# EAGLE board Line Follower (EAGLE 7.6.0)
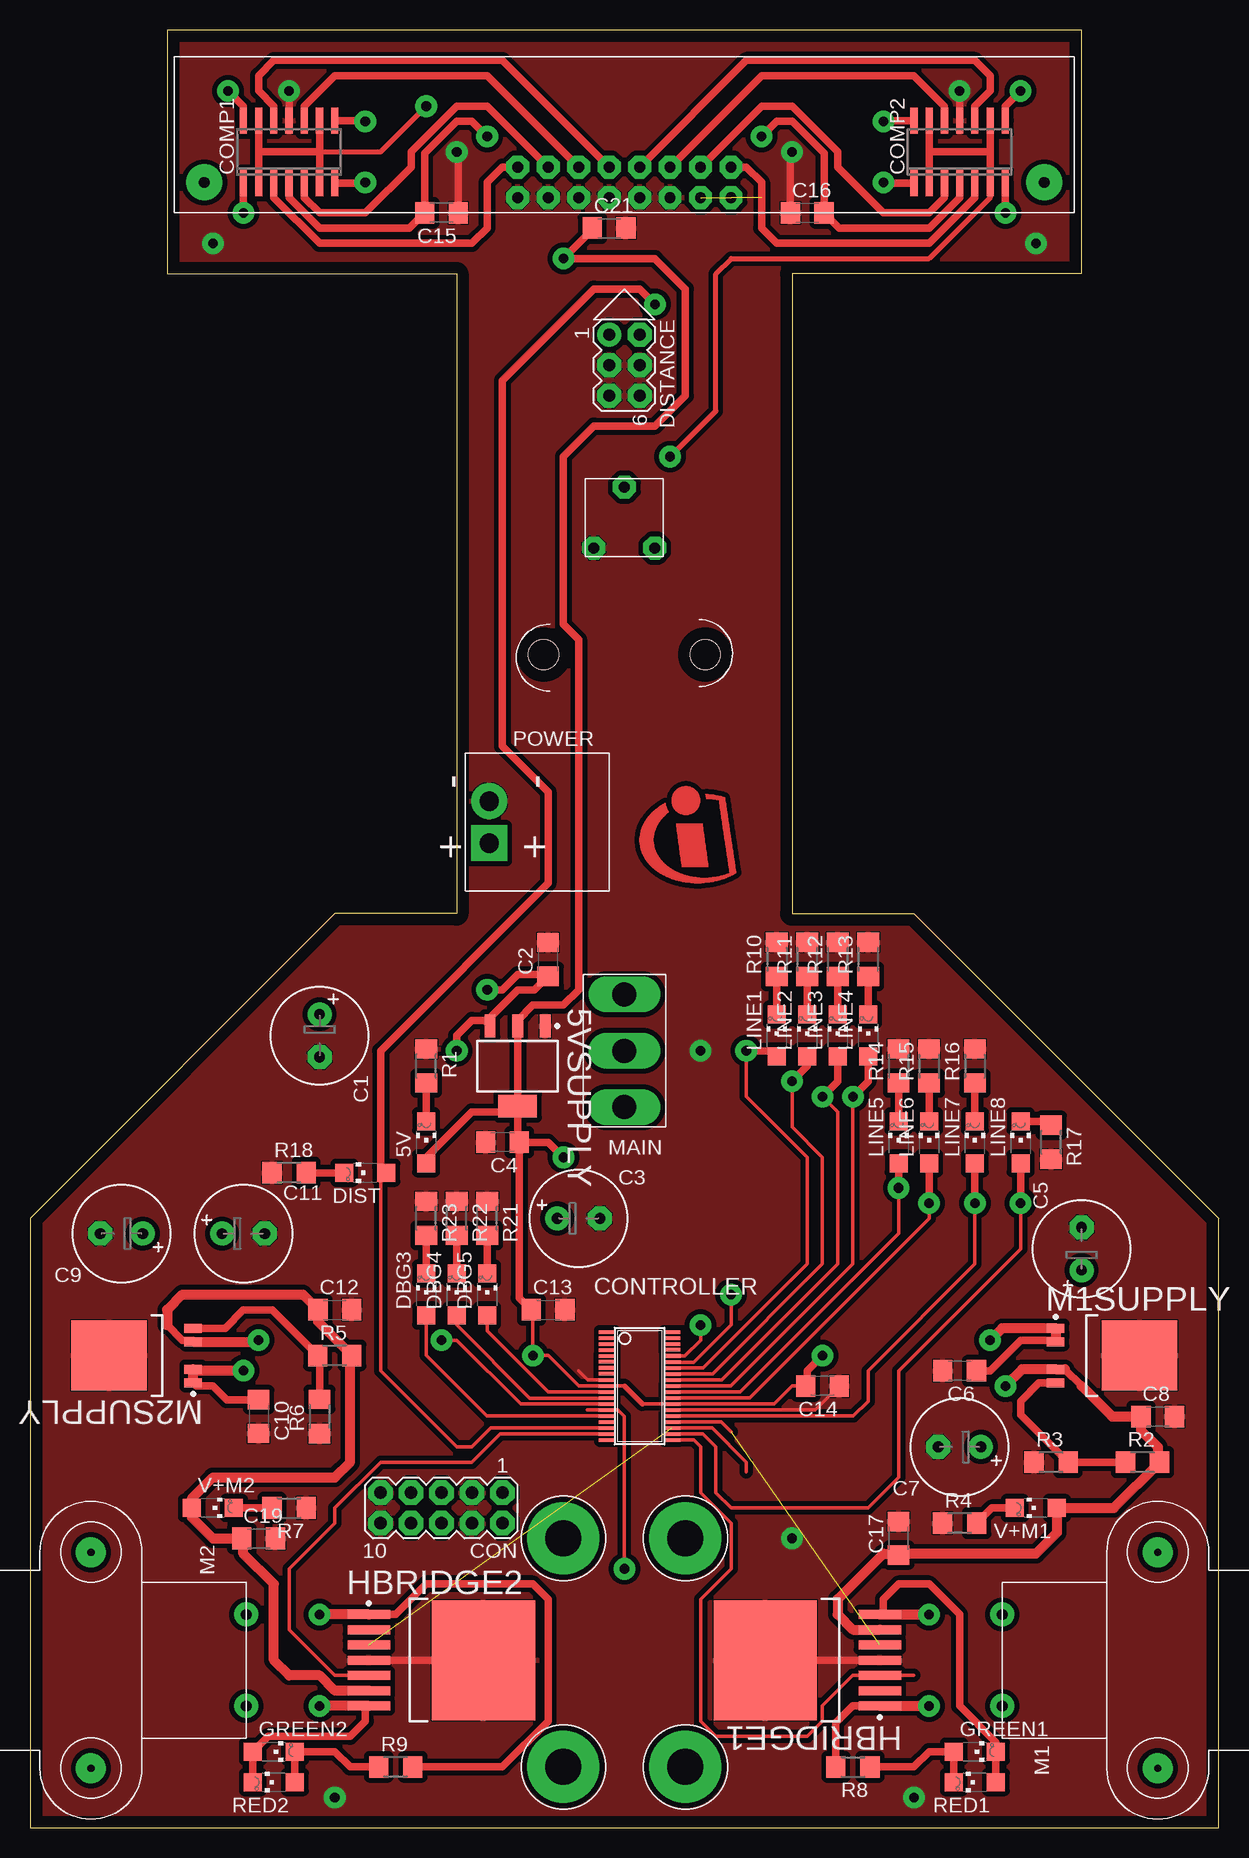
[diagram p0: board, top side]
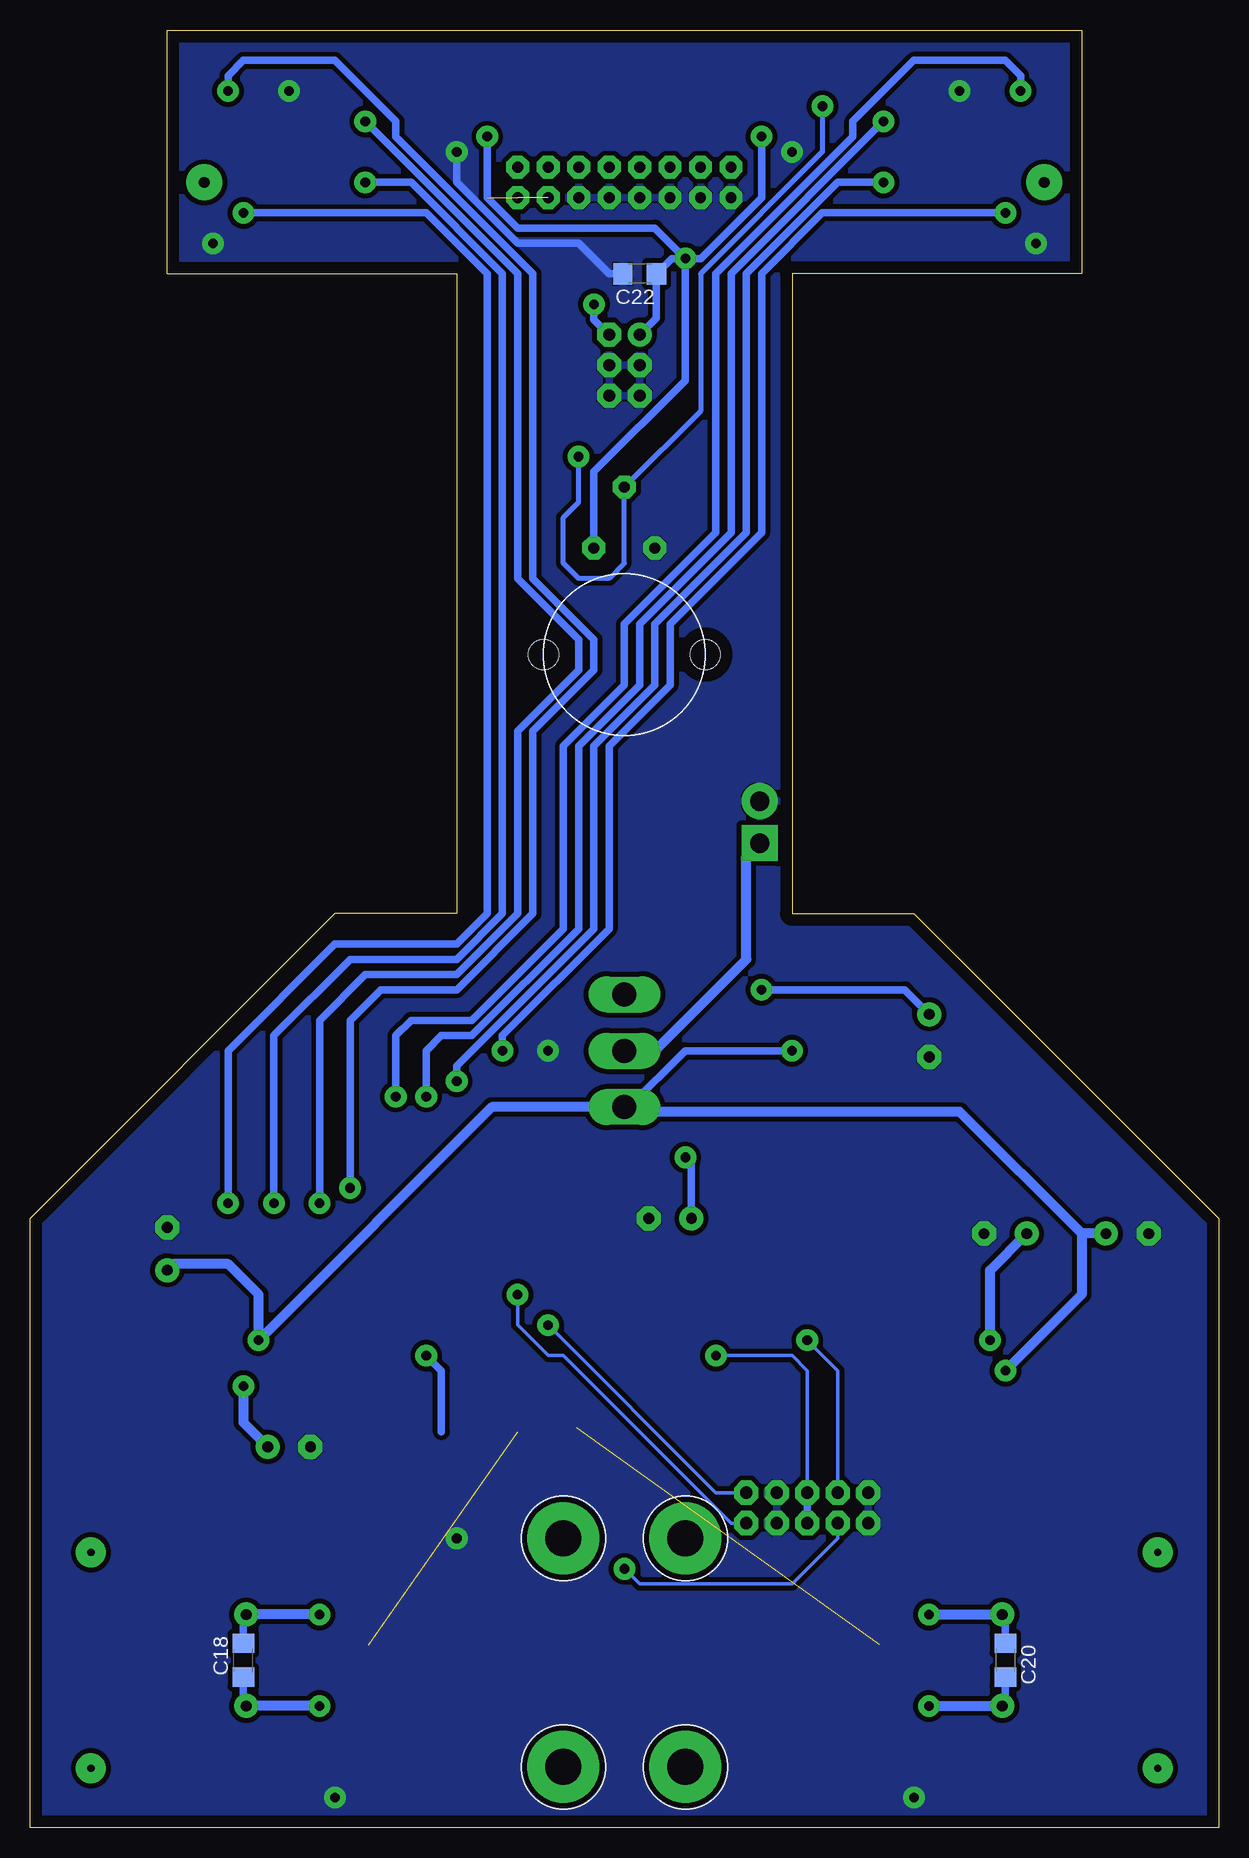
[diagram p1: board, bottom side, seen from below]

Size 99.06 x 149.86 mm. Coordinates in mm from the lower left corner, seen from the top.
Outline: 0,0 99.06,0 99.06,50.8 73.66,76.2 63.5,76.2 63.5,129.54 87.63,129.54 87.63,149.86 11.43,149.86 11.43,129.54 35.56,129.54 35.56,76.2 25.4,76.2 0,50.8 0,0
Copper layers (1*16): Top 0.035mm / dielectric 1.5mm / Bottom 0.035mm
Design rules "Line_Follower_Rules": minimum track width 0.3mm, minimum drill 0.3mm, track to track 0.17mm, track to pad 0.17mm, pad to pad 0.17mm, via to via 0.17mm, smd to smd 0.17mm, copper to edge 1mm, drill to drill 0.5mm, minimum pad ring 0.5mm, minimum via ring 0.5mm, stop-mask expansion 4mil, vias tented up to drill 0mil, thermal gap 0.1mm

## Footprints (pad centres in the part's own frame; a part is rotated, then mirrored left to right if it is on the bottom)
CHIPLED_1206 = smd 1.5 x 1.5: A 0,-1.75; C 0,1.75
INF-PG-SOT223_SC-73_M_1PRIMARY = smd 1.9 x 0.9: 1 -3.35,2.3; 2 -3.35,0; 3 -3.35,-2.3 | smd 1.9 x 3.2: 4 3.35,0
BALL = hole 2.5: -6.731,0; 6.731,0
E3,5-8 = drill 0.9 pad 2: + -1.778,0 | drill 0.9 pad 2 octagon: - 1.778,0
C1206 = smd 1.6 x 1.8: 1 -1.4,0; 2 1.4,0
SO14 = smd 0.6 x 2.2: 1 -3.81,-2.6; 2 -2.54,-2.6; 3 -1.27,-2.6; 4 0,-2.6; 5 1.27,-2.6; 6 2.54,-2.6; 7 3.81,-2.6; 8 3.81,2.6; 9 2.54,2.6; 10 1.27,2.6; 11 0,2.6; 12 -1.27,2.6; 13 -2.54,2.6; 14 -3.81,2.6
MA05-2 = drill 1.016 octagon: 1 -5.08,-1.27; 2 -5.08,1.27; 3 -2.54,-1.27; 4 -2.54,1.27; 5 0,-1.27; 6 0,1.27; 7 2.54,-1.27; 8 2.54,1.27; 9 5.08,-1.27; 10 5.08,1.27
XMC1000_P-TSSOP38-9 = smd 1.4 x 0.3: 1 -2.698,4.5; 2 -2.698,4.005; 3 -2.698,3.5; 4 -2.698,3.005; 5 -2.708,2.5; 6 -2.708,2.015; 7 -2.708,1.51; 8 -2.718,1.035; 9 -2.718,0.5; 10 -2.718,-0.005; 11 -2.718,-0.5; 12 -2.718,-1.025; 13 -2.708,-1.51; 14 -2.708,-2.005; 15 -2.708,-2.5; 16 -2.708,-2.995; 17 -2.708,-3.5; 18 -2.698,-3.995; 19 -2.698,-4.5; 20 2.698,-4.5; 21 2.698,-4; 22 2.698,-3.5; 23 2.698,-2.995; 24 2.698,-2.5; 25 2.698,-2.005; 26 2.708,-1.5; 27 2.708,-1; 28 2.708,-0.5; 29 2.708,-0.005; 30 2.718,0.5; 31 2.718,1; 32 2.718,1.5; 33 2.718,1.975; 34 2.718,2.51; 35 2.702,3.025; 36 2.702,3.5; 37 2.702,3.985; 38 2.702,4.5
MA03-2 = drill 1.016 pad 1.93: 1 -2.54,-1.27 | drill 1.016 pad 1.93 octagon: 2 -2.54,1.27; 3 0,-1.27; 4 0,1.27; 5 2.54,-1.27; 6 2.54,1.27
INF-PG-TO263-7-1_L_1PRIMARY = smd 3.55 x 0.75: 1 -6.05,3.81; 2 -6.05,2.54; 3 -6.05,1.27; 4 -6.05,0; 5 -6.05,-1.27; 6 -6.05,-2.54; 7 -6.05,-3.81 | smd 8.6 x 10: 8 3.5,0
QTR-8A = drill 0.9 pad 1.7 octagon: P$1 8.89,1.27; P$2 8.89,-1.27; P$3 6.35,1.27; P$4 6.35,-1.27; P$5 3.81,1.27; P$6 3.81,-1.27; P$7 1.27,1.27; P$8 1.27,-1.27; P$9 -1.27,1.27; P$10 -1.27,-1.27; P$11 -3.81,1.27; P$12 -3.81,-1.27; P$13 -6.35,1.27; P$14 -6.35,-1.27; P$15 -8.89,1.27; P$16 -8.89,-1.27 | drill 0.9 pad 3: P$17 -35,0; P$18 35,0
MICRO-MOTOR = drill 0.6 pad 2.5: 1 -9,0; 2 9,0 | drill 0.9 pad 2: M1 -3.81,12.95; M2 3.81,12.95
INF-PG-TO252-5-11_L_1PRIMARY = smd 1.45 x 0.75: 1 -4.7,2.28; 2 -4.7,1.14; 4 -4.7,-1.14; 5 -4.7,-2.28 | smd 6.3 x 5.85: 3 2.3,0
MS111 = drill 2 pad 3 long: P$1 0,4.7; P$2 0,0; P$3 0,-4.7
PWRCON = drill 1.6 pad 3 square: + -1.75,10 | drill 1.6 pad 3: - 1.75,10
R1206 = smd 1.6 x 1.803: 1 -1.422,0; 2 1.422,0
TRIMMER = drill 0.9 pad 1.8 octagon: 1 -2.54,-1.27; 2 2.54,-1.27; 3 0,3.81
SPACERS_M3 = drill 3 pad 6: P$1 0,0

## Placement (x,y rotation side)
5V  LED  [CHIPLED_1206]  33.02,57.15 0 top
5VSUPPLY  IFX8117ME_V50  [INF-PG-SOT223_SC-73_M_1PRIMARY]  40.64,63.5 270 top
BALL  BALL  [BALL]  49.53,97.79 0 bottom
C1  C-POL470UF  [E3,5-8]  24.13,66.04 270 top
C2  C100NF  [C1206]  43.18,72.39 90 top
C3  C-POL470UF  [E3,5-8]  45.72,50.8 0 top
C4  C100NF  [C1206]  39.37,57.15 180 top
C5  C-POL470UF  [E3,5-8]  87.63,48.26 90 top
C6  C100NF  [C1206]  77.47,38.1 180 top
C7  C-POL470UF  [E3,5-8]  77.47,31.75 180 top
C8  C100NF  [C1206]  93.98,34.29 0 top
C9  C-POL470UF  [E3,5-8]  7.62,49.53 180 top
C10  C100NF  [C1206]  19.05,34.29 270 top
C11  C-POL470UF  [E3,5-8]  17.78,49.53 0 top
C12  C100NF  [C1206]  25.4,43.18 0 top
C13  C100NF  [C1206]  43.18,43.18 0 top
C14  C100NF  [C1206]  66.04,36.83 180 top
C15  C100NF  [C1206]  34.29,134.62 180 top
C16  C100NF  [C1206]  64.77,134.62 0 top
C17  C100NF  [C1206]  72.39,24.13 90 top
C18  C100NF  [C1206]  81.28,13.97 90 bottom
C19  C100NF  [C1206]  19.05,24.13 0 top
C20  C100NF  [C1206]  17.78,13.97 270 bottom
C21  C100NF  [C1206]  48.26,133.35 0 top
C22  C100NF  [C1206]  48.26,129.54 180 bottom
COMP1  LM324  [SO14]  21.59,139.7 0 top
COMP2  LM324  [SO14]  77.47,139.7 0 top
CON  PROGRAMMING  [MA05-2]  34.29,26.67 180 top
CONTROLLER  XMC1000_XMC1000-T038  [XMC1000_P-TSSOP38-9]  50.8,36.83 0 top
DBG3  LED  [CHIPLED_1206]  33.02,44.45 0 top
DBG4  LED  [CHIPLED_1206]  35.56,44.45 0 top
DBG5  LED  [CHIPLED_1206]  38.1,44.45 0 top
DIST  LED  [CHIPLED_1206]  27.94,54.61 90 top
DISTANCE  DISTANCE_SENSOR  [MA03-2]  49.53,121.92 270 top
GREEN1  LED  [CHIPLED_1206]  78.74,6.35 270 top
GREEN2  LED  [CHIPLED_1206]  20.32,6.35 270 top
HBRIDGE1  TLE5206  [INF-PG-TO263-7-1_L_1PRIMARY]  64.77,13.97 180 top
HBRIDGE2  TLE5206  [INF-PG-TO263-7-1_L_1PRIMARY]  34.29,13.97 0 top
LINE  QTR-8ASENSOR_BAR  [QTR-8A]  49.53,137.16 0 top
LINE1  LED  [CHIPLED_1206]  62.23,66.04 0 top
LINE2  LED  [CHIPLED_1206]  64.77,66.04 0 top
LINE3  LED  [CHIPLED_1206]  67.31,66.04 0 top
LINE4  LED  [CHIPLED_1206]  69.85,66.04 0 top
LINE5  LED  [CHIPLED_1206]  72.39,57.15 0 top
LINE6  LED  [CHIPLED_1206]  74.93,57.15 0 top
LINE7  LED  [CHIPLED_1206]  78.74,57.15 0 top
LINE8  LED  [CHIPLED_1206]  82.55,57.15 0 top
M1  MOTORPCBMOTOR  [MICRO-MOTOR]  93.98,13.97 90 top
M1SUPPLY  TLF1963  [INF-PG-TO252-5-11_L_1PRIMARY]  90.17,39.37 0 top
M2  MOTORPCBMOTOR  [MICRO-MOTOR]  5.08,13.97 270 top
M2SUPPLY  TLF1963  [INF-PG-TO252-5-11_L_1PRIMARY]  8.89,39.37 180 top
MAIN  SWITCH1OFF2  [MS111]  49.53,64.77 180 top
POWER  PWRCONCON1  [PWRCON]  48.26,83.82 90 top
R1  470  [R1206]  33.02,63.5 270 top
R2  47K  [R1206]  92.71,30.48 0 top
R3  12K  [R1206]  85.09,30.48 0 top
R4  470  [R1206]  77.47,25.4 0 top
R5  47K  [R1206]  25.4,39.37 0 top
R6  12K  [R1206]  24.13,34.29 90 top
R7  470  [R1206]  21.59,26.67 180 top
R8  470  [R1206]  68.58,5.08 180 top
R9  470  [R1206]  30.48,5.08 0 top
R10  470  [R1206]  62.23,72.39 90 top
R11  470  [R1206]  64.77,72.39 90 top
R12  470  [R1206]  67.31,72.39 90 top
R13  470  [R1206]  69.85,72.39 90 top
R14  470  [R1206]  72.39,63.5 90 top
R15  470  [R1206]  74.93,63.5 90 top
R16  470  [R1206]  78.74,63.5 90 top
R17  470  [R1206]  85.09,57.15 270 top
R18  470  [R1206]  21.59,54.61 0 top
R21  470  [R1206]  38.1,50.8 270 top
R22  470  [R1206]  35.56,50.8 270 top
R23  470  [R1206]  33.02,50.8 270 top
RED1  LED  [CHIPLED_1206]  78.74,3.81 90 top
RED2  LED  [CHIPLED_1206]  20.32,3.81 90 top
SENSITIVITY  R-TRIMMER  [TRIMMER]  49.53,107.95 0 top
U$1  [INFINEON_LOGO_INFINEON_ICON_8]  50.8,78.74 0 top
U$2  SPACER  [SPACERS_M3]  44.45,5.08 0 top
U$3  SPACER  [SPACERS_M3]  54.61,5.08 0 top
U$4  SPACER  [SPACERS_M3]  44.45,24.13 0 top
U$5  SPACER  [SPACERS_M3]  54.61,24.13 0 top
V+M1  LED  [CHIPLED_1206]  83.82,26.67 90 top
V+M2  LED  [CHIPLED_1206]  15.24,26.67 270 top

## Library data of the parts
5V 5VSUPPLY BALL C1-C22 COMP1 COMP2 CON CONTROLLER DBG3-DBG5 DIST DISTANCE GREEN1 GREEN2 HBRIDGE1 HBRIDGE2 LINE LINE1-LINE8 M1 M1SUPPLY M2 M2SUPPLY MAIN POWER R1-R18 R21-R23 RED1 RED2 SENSITIVITY U$1-U$5 V+M1 V+M2 = Line_Follower_LIBV2.1

## Nets
+5V: 5V.A 5VSUPPLY.2 5VSUPPLY.4 C3.+ C4.1 C13.1 C14.2 C15.2 C16.2 C21.1 C22.1 COMP1.4 COMP2.4 CON.5 CON.6 CONTROLLER.10 CONTROLLER.26 DISTANCE.1 LINE.P$2 LINE.P$4 SENSITIVITY.2
GND: 5VSUPPLY.1 C1.- C2.2 C3.- C4.2 C5.- C6.2 C7.- C8.2 C9.- C10.2 C11.- C12.2 C13.2 C14.1 C15.1 C16.1 C17.2 C19.2 C21.2 C22.2 COMP1.11 COMP2.11 CON.3 CON.4 CON.9 CON.10 CONTROLLER.9 CONTROLLER.25 DISTANCE.3 DISTANCE.4 DISTANCE.5 DISTANCE.6 HBRIDGE1.4 HBRIDGE1.8 HBRIDGE2.4 HBRIDGE2.8 LINE.P$6 LINE.P$8 LINE.P$10 LINE.P$12 LINE.P$14 LINE.P$16 M1SUPPLY.3 M2SUPPLY.3 POWER.- R1.1 R3.1 R4.1 R6.1 R7.1 R10.2 R11.2 R12.2 R13.2 R14.2 R15.2 R16.2 R17.2 R18.1 R21.1 R22.1 R23.1 SENSITIVITY.1
IN1M1: CONTROLLER.20 HBRIDGE1.3
IN1M2: CONTROLLER.22 HBRIDGE2.3
IN2M1: CONTROLLER.23 HBRIDGE1.5
IN2M2: CONTROLLER.18 HBRIDGE2.5
N$1: MAIN.P$2 POWER.+
N$2: C20.2 GREEN2.A HBRIDGE2.7 M2.M2 RED2.C
N$3: 5V.C R1.2
N$4: CON.1 CONTROLLER.34
N$5: CON.2 CONTROLLER.33
N$6: CON.7 CONTROLLER.13
N$7: CON.8 CONTROLLER.14
N$8: COMP1.2 COMP1.6 COMP1.9 COMP1.13 COMP2.2 COMP2.6 COMP2.9 COMP2.13 SENSITIVITY.3
N$9: COMP1.3 LINE.P$15
N$10: COMP1.5 LINE.P$13
N$11: COMP1.10 LINE.P$11
N$12: COMP1.12 LINE.P$9
N$13: COMP2.5 LINE.P$1
N$14: COMP2.3 LINE.P$3
N$15: COMP2.12 LINE.P$5
N$16: COMP2.10 LINE.P$7
N$17: 5VSUPPLY.3 C1.+ C2.1 C5.+ C6.1 C9.+ C10.1 M1SUPPLY.1 M1SUPPLY.2 M2SUPPLY.1 M2SUPPLY.2 MAIN.P$1
N$18: M1SUPPLY.5 R2.1 R3.2
N$19: R4.2 V+M1.C
N$20: M2SUPPLY.5 R5.1 R6.2
N$21: R7.2 V+M2.C
N$22: GREEN1.A R8.1 RED1.C
N$23: C18.2 GREEN1.C HBRIDGE1.7 M1.M2 RED1.A
N$24: C18.1 HBRIDGE1.1 M1.M1 R8.2
N$25: C20.1 HBRIDGE2.1 M2.M1 R9.2
N$26: CONTROLLER.12 DBG4.A
N$27: COMP1.14 CONTROLLER.29 LINE4.A
N$28: COMP1.8 CONTROLLER.30 LINE3.A
N$29: COMP1.7 CONTROLLER.31 LINE2.A
N$30: COMP1.1 CONTROLLER.32 LINE1.A
N$31: COMP2.1 CONTROLLER.24 LINE7.A
N$32: COMP2.7 CONTROLLER.21 LINE8.A
N$33: COMP2.8 CONTROLLER.28 LINE5.A
N$34: COMP2.14 CONTROLLER.27 LINE6.A
N$35: CONTROLLER.17 DIST.A DISTANCE.2
N$37: LINE1.C R10.1
N$39: LINE2.C R11.1
N$40: LINE3.C R12.1
N$41: LINE4.C R13.1
N$42: LINE5.C R14.1
N$43: LINE6.C R15.1
N$44: LINE7.C R16.1
N$45: LINE8.C R17.1
N$46: DIST.C R18.2
N$51: CONTROLLER.15 DBG3.A
N$52: CONTROLLER.11 DBG5.A
N$54: DBG5.C R21.2
N$55: DBG4.C R22.2
N$56: DBG3.C R23.2
N$58: GREEN2.C R9.1 RED2.A
V+M1: C7.+ C8.1 C17.1 HBRIDGE1.6 M1SUPPLY.4 R2.2 V+M1.A
V+M2: C11.+ C12.1 C19.1 HBRIDGE2.6 M2SUPPLY.4 R5.2 V+M2.A

## Tracks (layer width: path | path; a pad name or v marks a point on that pad's centre or on a via)
+5V  (via drill 0.8 pad 1.78)  (2 unrouted)
  Top 0.305: C14.2 63.5,36.83 62,35.33 CONTROLLER.26 51.03,35.33 | 49.53,36.83 CONTROLLER.10 45.72,36.83 43.18,39.37 v41.91,39.37 41.91,43.05 C13.1
  Top 0.406: 51.03,35.33 49.53,36.83
  Top 0.61: 5VSUPPLY.4 5VSUPPLY.2 40.64,67.31 41.91,68.58 44.45,68.58 45.72,69.85 45.72,99.06 44.45,100.33 44.45,114.3 46.99,116.84 52.07,116.84 54.61,119.38 54.61,128.27 52.07,130.81 v44.45,130.81 46.99,133.35 46.99,133.22 C21.1 | 5VSUPPLY.4 40.64,57.28 C4.1 | v66.04,39.37 64.77,38.1 64.77,36.96 C14.2 | v44.45,55.88 43.18,57.15 C4.1 | 5V.A 33.02,55.88 36.83,59.69 40.18,59.69 5VSUPPLY.4 | COMP1.4 21.59,135.89 24.13,133.35 31.62,133.35 C15.2 | C15.2 32.89,137.03 | C15.2 32.89,139.57 35.56,142.24 36.83,142.24 v38.1,140.97 | COMP2.4 77.47,135.89 74.93,133.35 67.44,133.35 C16.2 66.17,139.57 63.5,142.24 62.23,142.24 v60.96,140.97 | C4.1 40.77,44.19 C13.1
  Bottom 0.305: v41.91,39.37 35.56,39.37 34.29,38.1 CON.5
  Bottom 0.61: 64.77,33.02 64.77,38.1 v66.04,39.37 | C3.+ 43.94,55.37 v44.45,55.88 | v38.1,140.97 38.1,135.89 43.18,130.81 v44.45,130.81 | v44.45,130.81 44.45,128.27 | 48.13,124.59 DISTANCE.1 46.86,125.86 C22.1 45.59,130.81 v44.45,130.81 | SENSITIVITY.2 52.07,113.03 44.45,120.65 v44.45,130.81 | v60.96,140.97 60.96,135.89 58.42,133.35 46.99,133.35 v44.45,130.81 | CON.5 CON.6
GND  (via drill 0.8 pad 1.78)
  Top 0.305: CONTROLLER.9 46.49,37.33 45.72,38.1 | CONTROLLER.25 65.44,34.83 C14.1
  Top 0.61: HBRIDGE2.8 HBRIDGE2.4 | HBRIDGE1.8 HBRIDGE1.4 | COMP1.11 v21.59,144.78 | C15.1 35.69,139.57 v35.56,139.7 | COMP2.11 v77.47,144.78 | C16.1 63.37,139.57 v63.5,139.7
  Bottom 0.61: C22.2 50.8,129.54 53.34,132.08 58.42,132.08 63.5,137.16 v63.5,139.7
  other vias: 15.24,132.08 83.82,132.08 55.88,64.77 63.5,24.13 25.4,2.54 73.66,2.54
  pour Bottom (isolate 0.406): 11.43,149.86 87.63,149.86 87.63,129.54 63.5,129.54 63.5,76.2 73.66,76.2 99.06,50.8 99.06,0 0,0 0,50.8 25.4,76.2 35.56,76.2 35.56,129.54 11.43,129.54
  pour Top (isolate 0.406): 11.43,149.86 87.63,149.86 87.63,129.54 63.5,129.54 63.5,76.2 73.66,76.2 99.06,50.8 99.06,0 0,0 0,50.8 25.4,76.2 35.56,76.2 35.56,129.54 11.43,129.54
IN1M1
  Top 0.305: CONTROLLER.20 55.3,32.33 55.88,31.75 55.88,27.94 58.42,25.4 58.42,21.59 55.88,19.05 55.88,8.89 57.15,7.62 64.77,7.62 66.04,8.89 66.04,10.16 68.58,12.7 HBRIDGE1.3 73.66,12.7
IN1M2  (1 unrouted)
  Top 0.305: CONTROLLER.22 56.84,33.33 59.69,30.48 59.69,29.69
IN2M1  (1 unrouted)
  Top 0.305: CONTROLLER.23 57.6,33.84 58.42,33.02
IN2M2
  Top 0.305: CONTROLLER.18 39.19,32.84 36.83,30.48 29.21,30.48 25.4,26.67 25.4,25.4 21.59,21.59 21.59,16.51 25.4,12.7 HBRIDGE2.5
N$1
  Bottom 0.813: MAIN.P$2 46.99,64.77 39.37,72.39 39.37,80.96 POWER.+
N$2  (via drill 0.8 pad 1.78)
  Top 0.61: RED2.C GREEN2.A 19.84,7.62 26.67,7.62 27.94,8.89 27.94,9.86 HBRIDGE2.7
  Top 0.813: HBRIDGE2.7 v24.13,10.16
  Bottom 0.61: C20.2 17.78,10.41 M2.M2
  Bottom 0.813: v24.13,10.16 M2.M2
N$3
  Top 0.61: 5V.C R1.2
N$4  (via drill 0.8 pad 1.78)
  Top 0.305: CONTROLLER.34 54.58,39.34 55.88,40.64 v55.88,41.91
  Bottom 0.305: CON.1 41.91,27.94 v55.88,41.91
N$5  (via drill 0.8 pad 1.78)
  Top 0.305: CONTROLLER.33 55.31,38.8 58.42,41.91 v58.42,44.45
  Bottom 0.305: v58.42,44.45 58.42,41.91 55.88,39.37 54.61,39.37 40.64,25.4 CON.2
N$6  (via drill 0.8 pad 1.78)
  Top 0.305: CONTROLLER.13 40.88,35.32 35.56,40.64 v34.29,40.64
  Bottom 0.305: CON.7 31.75,38.1 v34.29,40.64
N$7  (via drill 0.8 pad 1.78)
  Top 0.305: 46.45,34.83 CONTROLLER.14 48.99,34.83 49.53,34.29 v49.53,21.59
  Bottom 0.305: CON.8 31.75,24.13 35.56,20.32 48.26,20.32 v49.53,21.59
N$8  (via drill 0.8 pad 1.78)
  Top 0.406: 24.13,139.7 29.21,139.7 v33.02,143.51 | 80.01,139.7 80.01,135.89 74.93,130.81 58.42,130.81 57.15,129.54 57.15,118.11 v53.34,114.3
  Top 0.61: COMP1.2 19.05,139.7 | 19.05,139.7 COMP1.13 | 24.13,139.7 COMP1.6 | 24.13,139.7 19.05,139.7 | COMP1.9 24.13,139.7 | COMP2.9 80.01,139.7 | 80.01,139.7 COMP2.6 | COMP2.13 74.93,139.7 | COMP2.2 74.93,139.7 | 74.93,139.7 80.01,139.7
  Bottom 0.406: v33.02,143.51 33.02,139.7 43.18,129.54 43.18,118.11 SENSITIVITY.3 49.53,105.41 50.8,104.14 53.34,104.14 54.61,105.41 54.61,109.22 53.34,110.49 v53.34,114.3
N$9
  Top 0.61: COMP1.3 20.32,135.89 24.13,132.08 36.83,132.08 38.1,133.35 38.1,137.16 39.37,138.43 LINE.P$15
N$10
  Top 0.61: COMP1.5 22.86,135.89 24.13,134.62 27.94,134.62 31.75,138.43 31.75,139.7 35.56,143.51 38.1,143.51 LINE.P$13
N$11
  Top 0.61: COMP1.10 22.86,143.51 25.4,146.05 38.1,146.05 LINE.P$11
N$12
  Top 0.61: COMP1.12 20.32,143.51 19.05,144.78 19.05,146.05 20.32,147.32 39.37,147.32 LINE.P$9
N$13
  Top 0.61: COMP2.5 78.74,135.89 74.93,132.08 62.23,132.08 60.96,133.35 60.96,137.16 59.69,138.43 LINE.P$1
N$14
  Top 0.61: COMP2.3 76.2,135.89 74.93,134.62 71.12,134.62 67.31,138.43 67.31,139.7 63.5,143.51 60.96,143.51 LINE.P$3
N$15
  Top 0.61: COMP2.12 76.2,143.51 73.66,146.05 60.96,146.05 LINE.P$5
N$16
  Top 0.61: COMP2.10 78.74,143.51 80.01,144.78 80.01,146.05 78.74,147.32 59.69,147.32 LINE.P$7
N$17  (via drill 0.8 pad 1.78)
  Top 0.61: M1SUPPLY.2 85.34,40.64 82.55,40.64 80.01,38.1 C6.1 | C10.1 16.38,35.69 15.24,36.83 13.85,36.83 M2SUPPLY.1 | 38.1,67.09 37.88,67.31 36.83,67.31 35.56,66.04 v35.56,64.77 | 38.1,67.09 5VSUPPLY.3 | 38.1,67.09 38.1,67.31 40.64,69.85 42.04,69.85 C2.1 43.05,71.12 40.64,71.12 39.37,69.85 v38.1,69.85
  Top 0.813: M1SUPPLY.2 M1SUPPLY.1 81.02,41.65 v80.01,40.64 | M2SUPPLY.1 M2SUPPLY.2 13.72,38.1 v17.78,38.1
  Bottom 0.61: 49.15,59.69 49.15,60.07 44.45,64.77 v35.56,64.77 | v38.1,69.85 26.16,69.85 C1.+
  Bottom 0.813: C9.+ 11.43,49.53 | 11.43,49.53 21.59,59.69 49.15,59.69 MAIN.P$1 60.58,60.07 v80.01,40.64 80.01,44.45 82.55,46.99 87.12,46.99 C5.+ | 11.43,49.53 11.43,44.45 v17.78,38.1
N$18
  Top 0.61: R2.1 R3.2 82.55,34.44 82.55,35.56 84.08,37.09 M1SUPPLY.5
N$19
  Top 0.61: V+M1.C 80.16,26.67 R4.2
N$20
  Top 0.61: R6.2 24.13,39.37 R5.1 20.17,43.18 17.78,43.18 16.25,41.65 M2SUPPLY.5
N$21
  Top 0.61: V+M2.C R7.2
N$22
  Top 0.61: RED1.C GREEN1.A 74.93,6.35 73.66,5.08 R8.1
N$23  (via drill 0.8 pad 1.78)
  Top 0.61: RED1.A GREEN1.C 80.49,7.14 77.47,10.16 77.47,17.78 74.93,20.32 72.39,20.32 71.12,19.05 71.12,18.08 HBRIDGE1.7
  Top 0.813: HBRIDGE1.7 v74.93,17.78
  Bottom 0.61: C18.2 81.28,17.53 M1.M2
  Bottom 0.813: v74.93,17.78 M1.M2
N$24  (via drill 0.8 pad 1.78)
  Top 0.61: R8.2 67.16,8.74 68.58,10.16 HBRIDGE1.1
  Top 0.813: HBRIDGE1.1 v74.93,10.16
  Bottom 0.61: C18.1 81.28,10.41 M1.M1
  Bottom 0.813: v74.93,10.16 M1.M1
N$25  (via drill 0.8 pad 1.78)
  Top 0.61: HBRIDGE2.1 30.48,17.78 33.02,20.32 41.91,20.32 43.18,19.05 43.18,8.89 39.37,5.08 R9.2
  Top 0.813: HBRIDGE2.1 v24.13,17.78
  Bottom 0.61: C20.1 17.78,17.53 M2.M1
  Bottom 0.813: v24.13,17.78 M2.M1
N$26
  Top 0.305: DBG4.A 35.56,41.91 41.66,35.8 CONTROLLER.12
N$27  (via drill 0.8 pad 1.78)
  Top 0.305: CONTROLLER.29 58.41,36.83 68.58,46.99 v68.58,60.96
  Top 0.61: COMP1.14 17.78,143.51 v16.51,144.78 | LINE4.A 69.85,62.23 v68.58,60.96
  Bottom 0.61: v16.51,144.78 16.51,146.05 17.78,147.32 25.4,147.32 30.48,142.24 30.48,140.97 41.91,129.54 41.91,107.95 49.53,100.33 49.53,95.25 54.61,90.17 54.61,74.93 62.23,67.31 67.31,67.31 68.58,66.04 v68.58,60.96
N$28  (via drill 0.8 pad 1.78)
  Top 0.305: v66.04,60.96 67.31,59.69 67.31,46.99 57.65,37.33 CONTROLLER.30
  Top 0.61: COMP1.8 27.88,142.3 v27.94,142.24 | LINE3.A 67.31,62.23 v66.04,60.96
  Bottom 0.61: v27.94,142.24 40.64,129.54 40.64,107.95 48.26,100.33 48.26,95.25 53.34,90.17 53.34,74.93 62.23,66.04 64.77,66.04 66.04,64.77 v66.04,60.96
N$29  (via drill 0.8 pad 1.78)
  Top 0.305: v63.5,62.23 63.5,58.42 66.04,55.88 66.04,46.99 56.88,37.83 CONTROLLER.31
  Top 0.61: v27.94,137.16 27.88,137.1 COMP1.7 | LINE2.A 64.77,63.5 v63.5,62.23
  Bottom 0.61: v27.94,137.16 31.75,137.16 39.37,129.54 39.37,107.95 46.99,100.33 46.99,95.25 52.07,90.17 52.07,74.93 63.5,63.5 v63.5,62.23
N$30  (via drill 0.8 pad 1.78)
  Top 0.305: v59.69,64.77 59.69,60.96 64.77,55.88 64.77,46.99 56.11,38.33 CONTROLLER.32
  Top 0.61: COMP1.1 v17.78,134.62 | v59.69,64.77 61.75,64.77 LINE1.A
  Bottom 0.61: v17.78,134.62 33.02,134.62 38.1,129.54 38.1,107.95 45.72,100.33 45.72,95.25 50.8,90.17 50.8,74.93 59.69,66.04 v59.69,64.77
N$31  (via drill 0.8 pad 1.78)
  Top 0.305: CONTROLLER.24 68.62,34.33 69.85,35.56 69.85,38.1 78.74,46.99 v78.74,52.07
  Top 0.61: COMP2.1 71.18,137.1 v71.12,137.16 | v78.74,52.07 LINE7.A
  Bottom 0.61: v71.12,137.16 67.31,137.16 59.69,129.54 59.69,76.2 63.5,72.39 72.39,72.39 78.74,66.04 v78.74,52.07
N$32  (via drill 0.8 pad 1.78)
  Top 0.305: CONTROLLER.21 56.07,32.83 57.15,31.75 57.15,27.94 58.42,26.67 69.85,26.67 72.39,29.21 72.39,38.1 82.55,48.26 v82.55,52.07
  Top 0.61: COMP2.7 v81.28,134.62 | v82.55,52.07 LINE8.A
  Bottom 0.61: v81.28,134.62 66.04,134.62 60.96,129.54 60.96,76.2 63.5,73.66 73.66,73.66 82.55,64.77 v82.55,52.07
N$33  (via drill 0.8 pad 1.78)
  Top 0.305: v72.39,53.34 72.39,49.53 59.19,36.33 CONTROLLER.28
  Top 0.61: COMP2.8 81.28,143.51 v82.55,144.78 | v72.39,53.34 LINE5.A
  Bottom 0.61: v82.55,144.78 82.55,146.05 81.28,147.32 73.66,147.32 68.58,142.24 68.58,140.97 57.15,129.54 57.15,104.14 52.07,99.06 52.07,96.52 57.15,91.44 57.15,76.2 63.5,69.85 69.85,69.85 72.39,67.31 v72.39,53.34
N$34  (via drill 0.8 pad 1.78)
  Top 0.305: CONTROLLER.27 59.96,35.83 74.93,50.8 v74.93,52.07
  Top 0.61: COMP2.14 71.18,142.3 v71.12,142.24 | v74.93,52.07 LINE6.A
  Bottom 0.61: v71.12,142.24 58.42,129.54 58.42,104.14 53.34,99.06 53.34,96.52 58.42,91.44 58.42,76.2 63.5,71.12 71.12,71.12 74.93,67.31 v74.93,52.07
N$35  (via drill 0.8 pad 1.78)
  Top 0.305: CONTROLLER.17 38.41,33.33 36.83,31.75 35.56,31.75 29.21,38.1 29.21,54.13 DIST.A
  Top 0.61: v52.07,127 50.8,128.27 46.99,128.27 39.37,120.65 39.37,90.17 43.18,86.36 43.18,78.74 29.21,64.77 29.21,55.09 DIST.A
  Bottom 0.61: v52.07,127 52.07,125.73 DISTANCE.2
N$37
  Top 0.61: R10.1 LINE1.C
N$39
  Top 0.61: R11.1 LINE2.C
N$40
  Top 0.61: R12.1 LINE3.C
N$41
  Top 0.61: R13.1 LINE4.C
N$42
  Top 0.61: R14.1 LINE5.C
N$43
  Top 0.61: R15.1 LINE6.C
N$44
  Top 0.61: R16.1 LINE7.C
N$45
  Top 0.61: LINE8.C 84.76,58.9 R17.1
N$46
  Top 0.61: R18.2 DIST.C
N$51
  Top 0.305: CONTROLLER.15 38.06,34.33 33.02,39.37 DBG3.A
N$52
  Top 0.305: CONTROLLER.11 43.18,36.33 38.1,41.41 DBG5.A
N$54
  Top 0.61: R21.2 DBG5.C
N$55
  Top 0.61: R22.2 DBG4.C
N$56
  Top 0.61: R23.2 DBG3.C
N$58
  Top 0.61: RED2.A GREEN2.C 25.4,6.35 26.67,5.08 R9.1
V+M1  (via drill 0.8 pad 1.78)
  Top 0.61: 86.23,38.23 87.63,36.83
  Top 0.813: HBRIDGE1.6 68.58,16.51 67.31,17.78 67.31,19.05 71.12,22.86 72.26,22.86 C17.1 72.52,22.86 83.82,22.86 85.57,24.61 V+M1.A 90.32,26.67 R2.2 | 86.23,38.23 M1SUPPLY.4 82.68,38.23 v81.28,36.83 | 87.63,36.83 90.17,34.29 C8.1 92.58,33.15 93.98,31.75 93.98,30.63 R2.2 | R2.2 93.98,30.48
  Bottom 0.813: v81.28,36.83 81.28,33.78 C7.+
V+M2  (via drill 0.8 pad 1.78)
  Top 0.61: M2SUPPLY.4 13.46,40.64 12.7,40.64 11.43,41.91 | 26.67,39.22 R5.2
  Top 0.813: M2SUPPLY.4 18.92,40.51 v19.05,40.64 | 11.43,41.91 11.43,43.18 12.7,44.45 22.73,44.45 C12.1 24,42.19 R5.2 | 26.67,39.22 26.67,30.48 25.4,29.21 15.24,29.21 13.49,27.46 V+M2.A 13.49,25.88 15.24,24.13 C19.1 17.78,24 17.78,22.86 20.32,20.32 20.32,13.97 21.59,12.7 24.13,12.7 25.4,11.43 HBRIDGE2.6
  Bottom 0.813: v19.05,40.64 19.05,46.48 C11.+